# Altium PCB PlacaDriver.PcbDoc
Units mm, origin at the board's own origin, x right, y up, seen from the top; angles counter-clockwise.
Board outline 66.04 x 50 mm, 2 copper layers (Top Layer, Bottom Layer); 21 components, 15 nets, 54 pads, 4 vias.
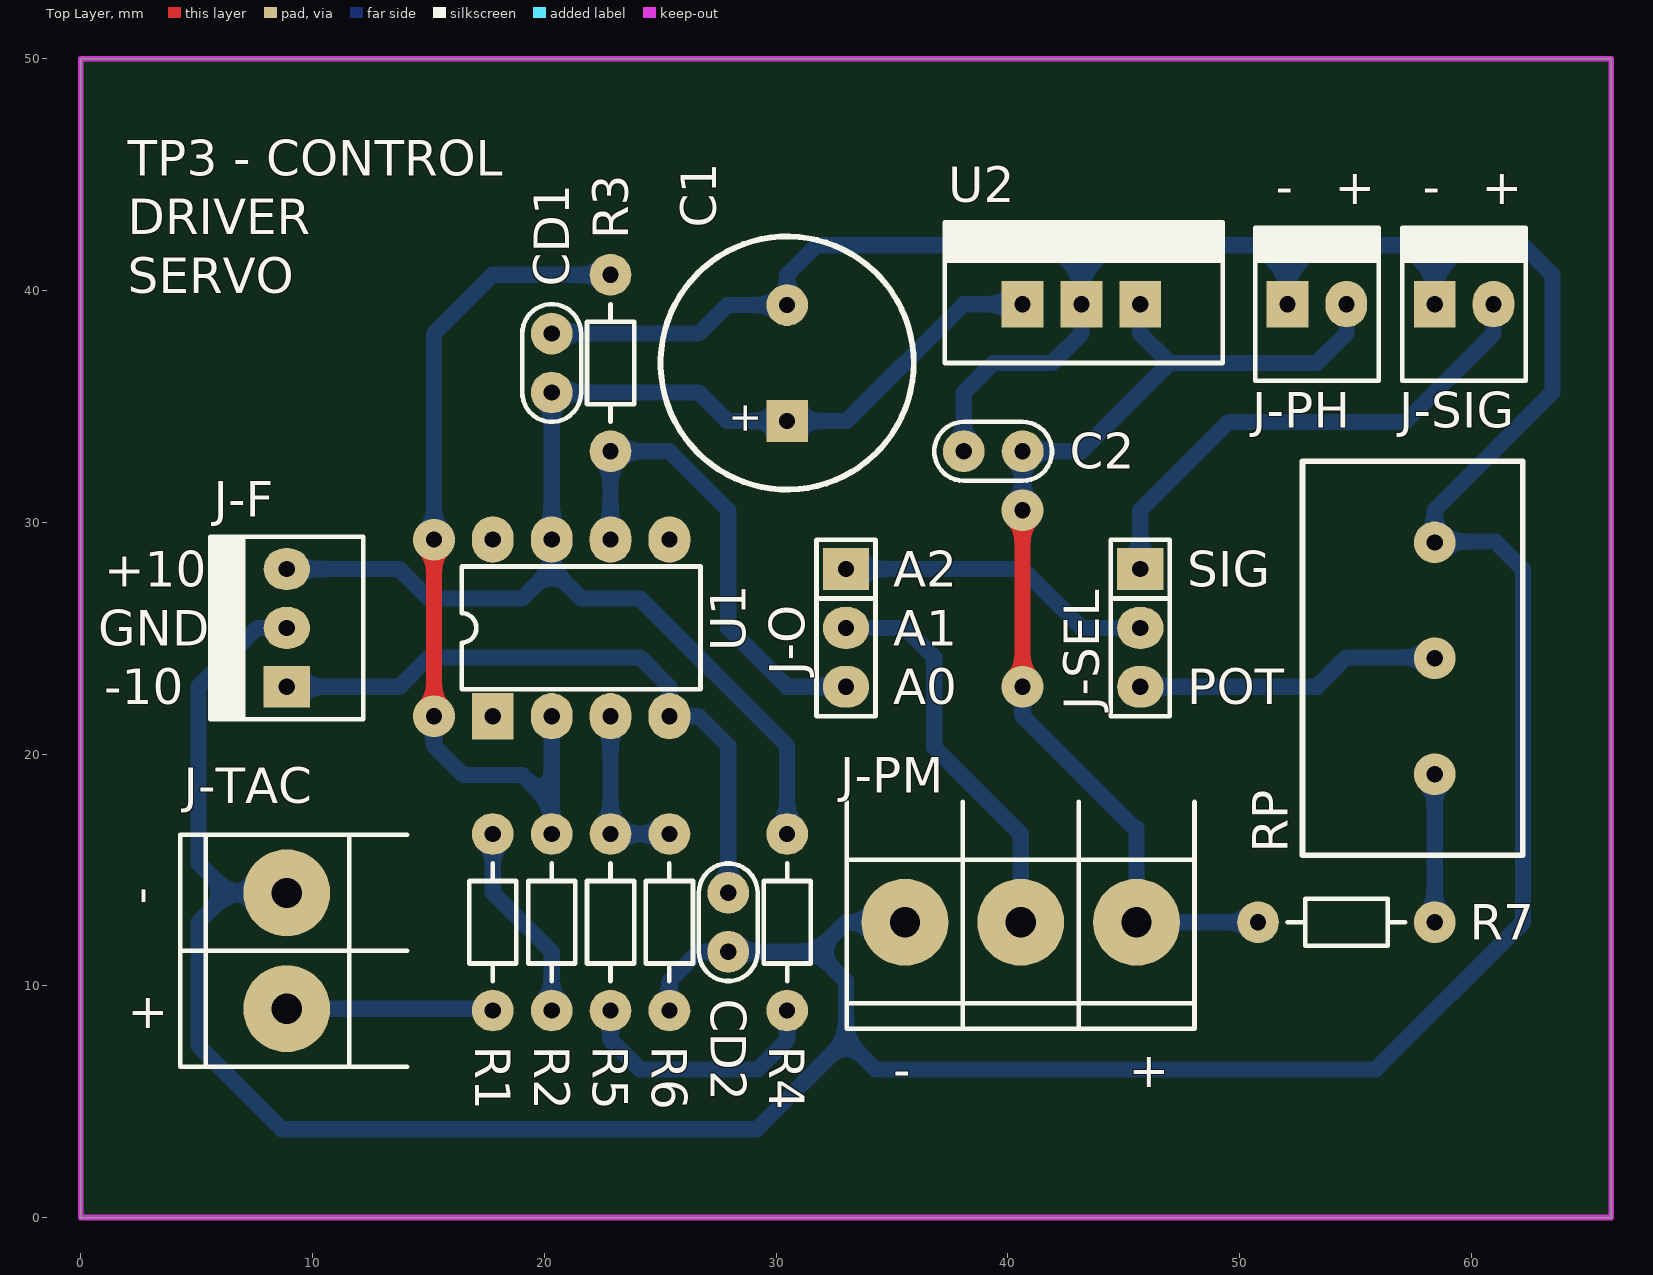
[diagram p0: Top Layer view]
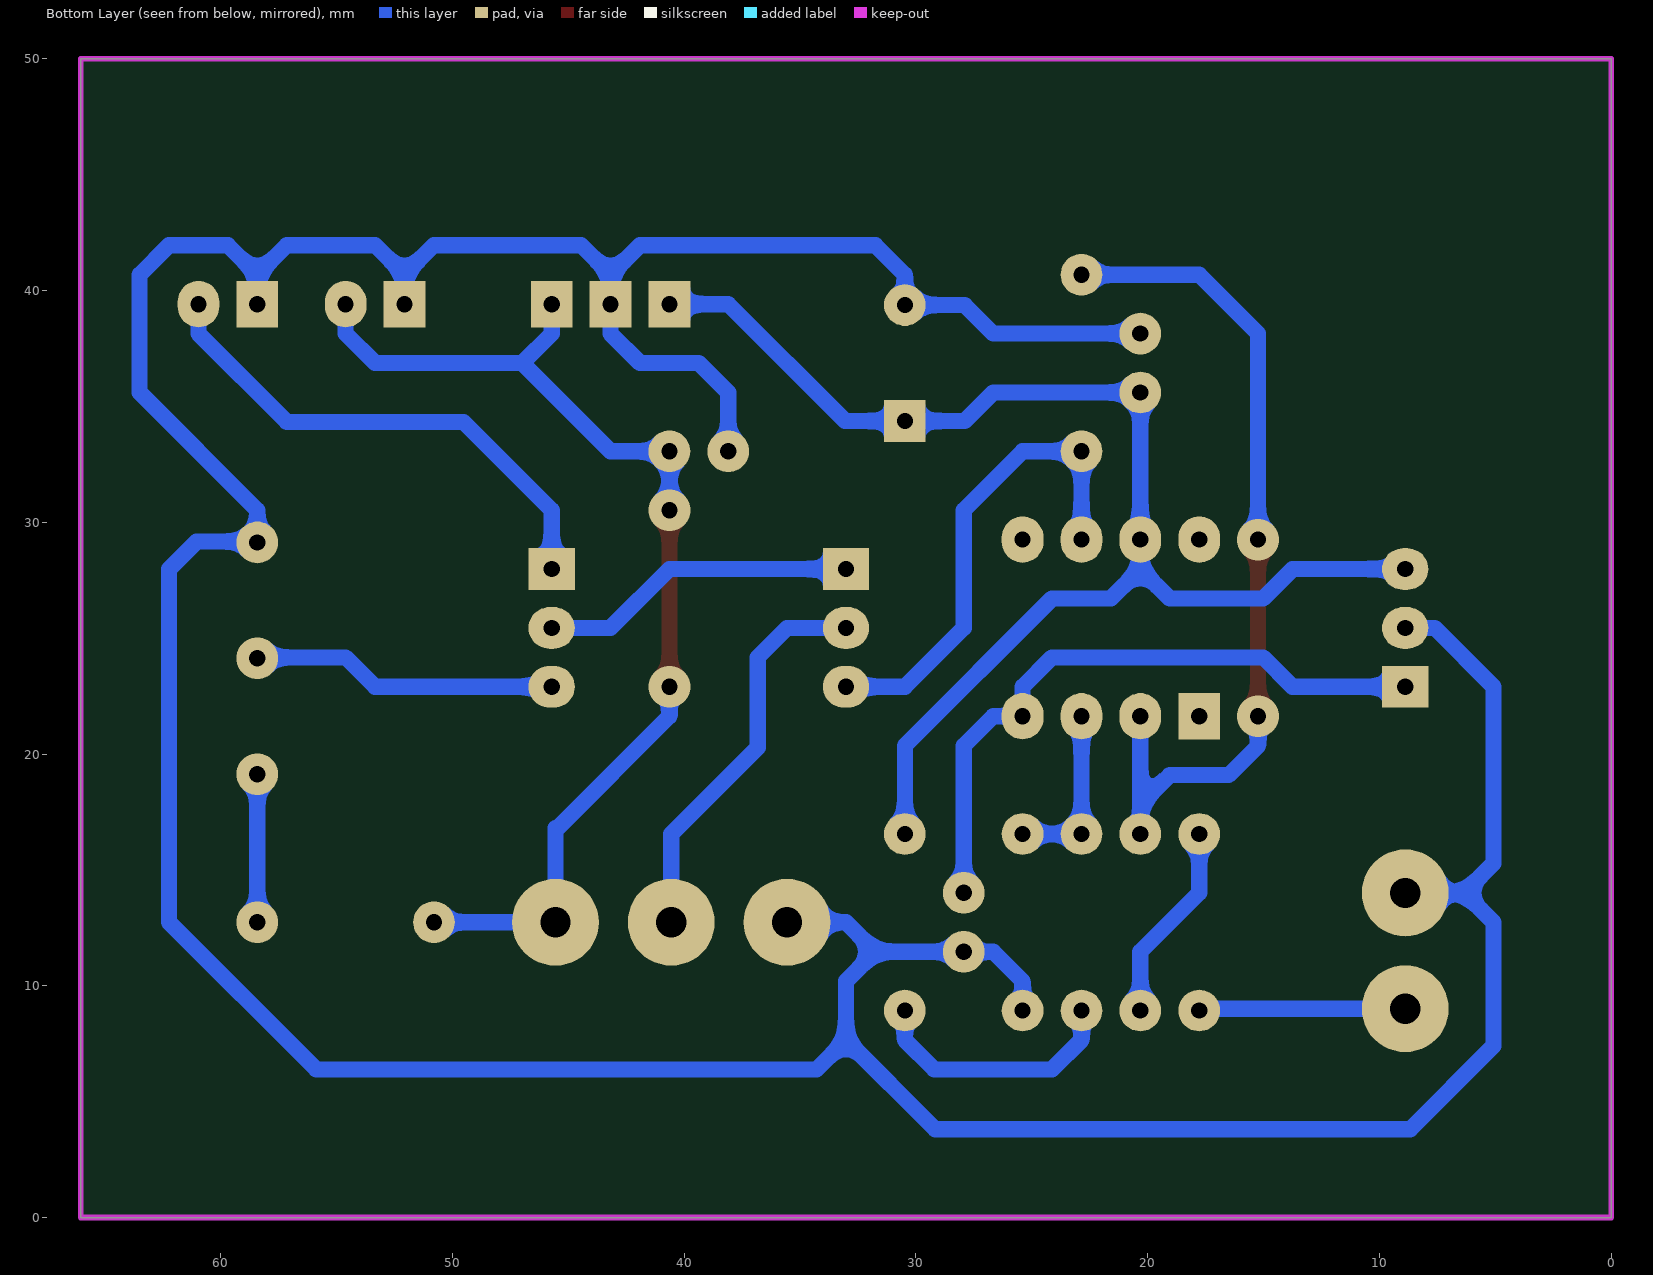
[diagram p1: Bottom Layer view, seen from below]
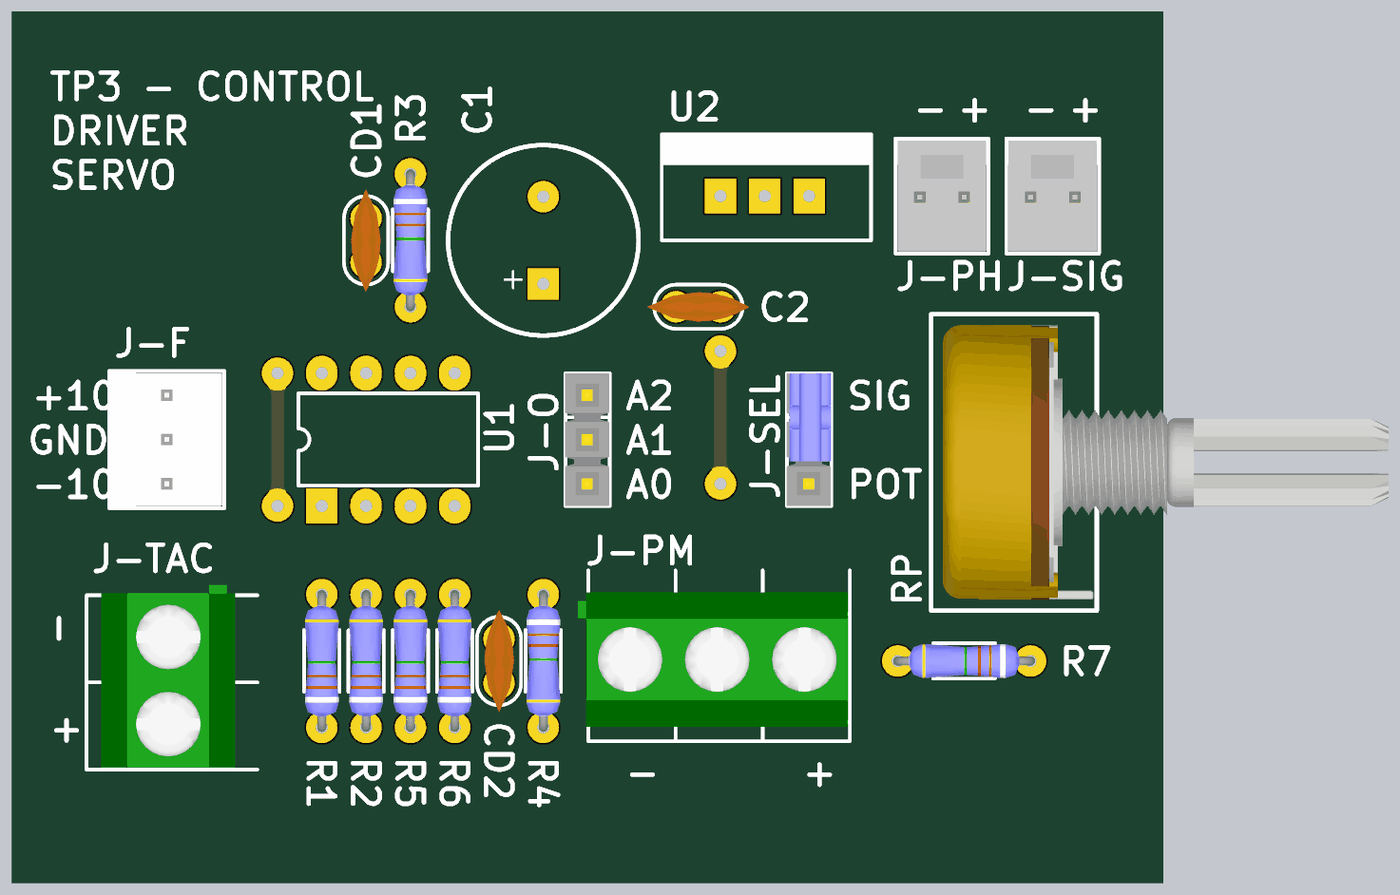
[diagram p2: 3D render of the assembled board from above, using the file's embedded part models]

## Layer stack, top to bottom
Top Solder: solder mask 0.0102, Solder Resist, Dk 3.5
Top Layer: signal copper 0.0356
Dielectric 1: dielectric 0.32, FR-4, Dk 4.8
Bottom Layer: signal copper 0.0356
Bottom Solder: solder mask 0.0102, Solder Resist, Dk 3.5

## Board outline
0,0 0,50 66.04,50 66.04,0

## Design rules (kind name [scope] priority, off if disabled: settings)
Clearance [All] p1: gap=0.7 ignorepadtopadclearanceinfootprint=FALSE
PolygonConnect [All] p1: connectstyle=Relief reliefconductorwidth=0.254 reliefentries=4 polygonreliefangle="90 Angle" airgapwidth=0.254
RoutingVias [All] p1: holewidth=0.7 width=1.8 viastyle="Through Hole" minholewidth=0.7 minwidth=1.8 maxholewidth=0.7 maxwidth=1.8
SolderMaskExpansion [All] p1: expansion=0.102
Width [All] p1: maxlimit=0.7 minlimit=0.7 preferedwidth=0.7
30 further rules are at their usual default settings.

## Components (designator, comment, footprint, x,y, rotation, side; value= is the part's Value field where it differs from the comment)
C1 "330u" CAP200RP 30.48,36.87 r90 top
C2 "100n" CAP100 39.37,33.06 r180 top
CD1 "100n" CAP100 20.32,36.87 r90 top
CD2 "100n" CAP100 27.94,12.74 r270 top
J-F "FUENTE" MOLEX3 8.89,22.9 r90 top
J-O "ARDUINO" SIP3 33.02,25.44 r270 top
J-PH "PUENTE H" MOLEX2 52.07,39.41 r0 top
J-PM "POTE MOTOR" BORNERA3 40.56,12.74 r90 top
J-SEL "A2 SELECT" JUMPER3 45.72,25.44 r270 top
J-SIG "SEÑAL" MOLEX2 58.42,39.41 r0 top
J-TAC "TACOMETRO" BORNERA2 8.89,11.51 r0 top
R1 "3K9" RES300 17.78,8.93 r90 top
R2 "100" RES300 20.32,8.93 r90 top
R3 "1K" RES300 22.86,40.68 r270 top
R4 "3K9" RES300 30.48,16.55 r270 top
R5 "100" RES300 22.86,8.93 r90 top
R6 "1K" RES300 25.4,8.93 r90 top
R7 "1K" RES300 58.42,12.74 r180 top
RP "5K" POTENCIOMETRO 58.42,24.13 r90 top
U1 "TL081JG" JG008 21.59,25.44 r0 top
U2 "7806" "TO-220 V" 43.18,39.41 r0 top

## Footprints (in the part's own frame and the unit in brackets; to place one, negate y for a bottom-side part, rotate by r counter-clockwise, add the part's x,y. Pads: shape width x height; smd on the part's side, far side on the other; paste and mask are expansions set on the pad)
BORNERA2 [mm] "Bornera con Tornillos 5mm separación"
  round 3.75 hole 1.3: 1(0,2.5) 2(0,-2.5)
  silkscreen extent -4.6,-5 5.2,5, body extent -3.76,-4.89 3.94,5.61, height 10
BORNERA3 [mm] "Bornera con Tornillos 5mm separación"
  round 3.75 hole 1.3: 1(0,5) 2(0,0) 3(0,-5)
  silkscreen extent -4.6,-7.5 5.2,7.5, body extent -3.76,-7.39 3.94,8.11, height 10.05
CAP100 [mm]
  round 1.8 hole 0.7: 1(-1.27,0) 2(1.27,0)
  silkscreen extent -2.54,-1.27 2.54,1.27, body extent -2.92,-0.84 2.92,0.86, height 6.12
CAP200RP [mm] "Body Diameter 10.33mm"
  rect 1.8x1.8 hole 0.7: 1(-2.5,0)
  round 1.8 hole 0.7: 2(2.5,0)
  silkscreen extent -5.46,-5.46 5.46,5.46, body extent -5.2,-5.18 5.18,5.21, height 20
JG008 [mm] "DIP; 8 Leads; Row Spacing 7.62 mm; Pitch 2.54 mm"
  rect 1.8x2 hole 0.7: 1(-3.81,-3.81)
  oval 1.8x2 hole 0.7: 2(-1.27,-3.81) 3(1.27,-3.81) 4(3.81,-3.81) 5(3.81,3.81) 6(1.27,3.81) 7(-1.27,3.81) 8(-3.81,3.81)
  silkscreen extent -5.15,-2.65 5.15,2.65
JUMPER3 [mm]
  rect 1.8x2 hole 0.7: 1(-2.54,0)
  oval 1.8x2 hole 0.7: 2(0,0) 3(2.54,0)
  silkscreen extent -3.81,-1.27 3.81,1.27, body extent -3.81,-1.3 3.81,1.27, height 16.15
MOLEX2 [mm]
  rect 1.8x2 hole 0.7: 1(0,0)
  oval 1.8x2 hole 0.7: 2(2.54,0)
  silkscreen extent -1.4,-3.3 3.94,3.3, body extent -1.27,-3.17 3.81,3.17, height 10.74
MOLEX3 [mm]
  rect 1.8x2 hole 0.7: 1(0,0)
  oval 1.8x2 hole 0.7: 2(2.54,0) 3(5.08,0)
  silkscreen extent -1.4,-3.3 6.48,3.3, body extent -1.27,-3.17 6.35,3.18, height 10.74
POTENCIOMETRO [mm]
  round 1.8 hole 0.7: 1(-5,0) 2(0,0) 3(5,0)
  silkscreen extent -8.5,-3.8 8.5,5.7, body extent -7.87,-20.53 7.87,5.03, height 20.12
RES300 [mm]
  round 1.8 hole 0.7: 1(0,0) 2(7.62,0)
  silkscreen extent 1.27,-1.02 6.35,1.02, body extent -0.25,-0.97 7.87,0.97, height 2.01
SIP3 [mm]
  rect 1.8x2 hole 0.7: 1(-2.54,0)
  oval 1.8x2 hole 0.7: 2(0,0) 3(2.54,0)
  silkscreen extent -3.81,-1.27 3.81,1.27, body extent -3.81,-1.3 3.81,1.24, height 8.38
"TO-220 V" [mm]
  rect 1.8x2 hole 0.7: 1(-2.54,0) 2(0,0) 3(2.54,0)
  silkscreen extent -5.9,-2.54 6.1,3.54, body extent -5,-2 5,3, height 18

## Part data
C1: library part CAPPOL
C2 CD1 CD2: library part CAP
J-F: library part MOLEX3
J-O: library part CON3
J-PH J-SIG: library part MOLEX2
J-PM: library part "BORNERA 3"
J-SEL: library part JUMPER3
J-TAC: library part "BORNERA 2"
R1 R2 R3 R4 R5 R6 R7: library part RES
RP: library part POTENCIOMETRO
U1: "JFET-Input Operational Amplifier", ComponentLink1Description="Manufacturer Link", ComponentLink1URL=http://www.ti.com/, ComponentLink2Description=Datasheet, ComponentLink2URL=http://www-s.ti.com/sc/ds/tl081.pdf, DatasheetVersion=Feb-1999, LatestRevisionDate=04-Mar-2005, LatestRevisionNote="Stylized 3D Model Added.", Note="Pin 8 is not connected", PackageDescription="DIP; 8 Leads; Row Spacing 7.62 mm; Pitch 2.54 mm", PackageReference=JG008, PackageVersion=Jan-1995, Published=16-Jan-2001, Publisher="Altium Limited"
U2: library part 78XX, "REGULDOR POSITIVO"

## Via types
v1: diameter 1.8, hole 0.7, Top Layer to Bottom Layer, 4 vias

## Nets (pads, with @x,y where several pads share a name; then routed paths per layer and width w, separated by ;. In a path a pad name is that pad's centre, name@x,y a point inside that pad or via, vN(x,y) a via of type N, cw(c..) or ccw(c..) an arc to the next point about the centre after c; other vN are vias at no path point)
+6V: C2.1 J-PH.2 J-PM.3 R7.2 U2.3 | length 48.1
  Top Layer w0.7: v1(40.64,22.9) v1(40.64,30.52)
  Bottom Layer w0.7: v1(40.64,22.9) 40.64,21.63 45.466,16.804 45.56,16.804 J-PM.3 R7.2 ; v1(40.64,30.52) C2.1 43.18,33.06 46.99,36.87 ; U2.3 45.72,38.14 46.99,36.87 ; J-PH.2 54.61,38.14 53.34,36.87 46.99,36.87
+10V: C1.1 CD1.1 J-F.3 R4.1 U1.7 U2.1 | length 60.1
  Bottom Layer w0.7: J-F.3 13.752,27.98 15.022,26.71 19.05,26.71 20.32,27.98 ; R4.1 30.48,20.36 24.13,26.71 21.59,26.71 20.32,27.98 ; U2.1 38.1,39.41 33.06,34.37 C1.1 27.9,34.37 26.67,35.6 CD1.1 U1.7 20.32,27.98
-10V: CD2.1 J-F.1 U1.4 | length 28.2
  Bottom Layer w0.7: J-F.1 13.752,22.9 15.022,24.17 24.13,24.17 25.4,22.9 U1.4 26.67,21.63 27.94,20.36 CD2.1
A0: J-O.3 R3.2 U1.6 | length 21.2
  Bottom Layer w0.7: U1.6 R3.2 25.4,33.06 27.94,30.52 27.94,25.44 30.48,22.9 J-O.3
A1: J-O.2 J-PM.2 | length 17.3
  Bottom Layer w0.7: J-O.2 35.56,25.44 36.83,24.17 36.83,20.28 40.56,16.55 J-PM.2
A2: J-O.1 J-SEL.2 | length 13.8
  Bottom Layer w0.7: J-O.1 40.64,27.98 43.18,25.44 J-SEL.2
GND: C1.2 C2.2 CD1.2 CD2.2 J-F.2 J-PH.1 J-PM.1 J-SIG.1 J-TAC.1 R6.1 RP.3 U2.2 | length 200.3
  Bottom Layer w0.7: J-TAC.1 6.35,14.01 ; J-F.2 7.62,25.44 5.08,22.9 5.08,15.28 6.35,14.01 ; CD1.2 26.67,38.14 27.9,39.37 C1.2 30.48,40.68 31.75,41.95 41.91,41.95 43.18,40.68 ; R6.1 25.4,10.2 26.67,11.47 CD2.2 31.75,11.47 ; J-PM.1 33.02,12.74 31.75,11.47 ; C2.2 38.1,35.6 39.37,36.87 41.91,36.87 43.18,38.14 U2.2 43.18,40.68 ; J-PH.1 52.07,40.68 ; J-SIG.1 58.42,40.68 ; 6.35,14.01 5.08,12.74 5.08,7.406 8.676,3.81 29.17,3.81 33.02,7.66 ; 31.75,11.47 33.02,10.2 33.02,7.66 ; 33.02,7.66 34.29,6.39 55.88,6.39 62.23,12.74 62.23,27.98 61.04,29.17 58.42,29.17 58.42,30.52 63.5,35.6 63.5,40.68 62.23,41.95 59.69,41.95 58.42,40.68 ; 43.18,40.68 44.45,41.95 50.8,41.95 52.07,40.68 ; 52.07,40.68 53.34,41.95 57.15,41.95 58.42,40.68
NetJ-SEL_1: J-SEL.1 J-SIG.2 | length 22.2
  Bottom Layer w0.7: J-SEL.1 45.72,30.52 49.53,34.33 57.15,34.33 60.96,38.14 J-SIG.2
NetJ-SEL_3: J-SEL.3 RP.2 | length 13.2
  Bottom Layer w0.7: J-SEL.3 53.34,22.9 54.61,24.17 RP.2@58.42,24.17
NetJ-TAC_2: J-TAC.2 R1.1 | length 8.9
  Bottom Layer w0.7: J-TAC.2 R1.1@17.78,9.01
NetR1_2: R1.2 R2.1 | length 8.7
  Bottom Layer w0.7: R1.2 17.78,14.01 20.32,11.47 R2.1
NetR2_2: R2.2 R3.1 U1.2 | length 37.7
  Top Layer w0.7: v1(15.24,21.63) v1(15.24,29.25)
  Bottom Layer w0.7: v1(15.24,21.63) 15.24,20.36 16.51,19.09 19.05,19.09 20.32,17.82 ; v1(15.24,29.25) 15.24,38.14 17.78,40.68 R3.1 ; R2.2 20.32,17.82 ; U1.2 20.32,17.82
NetR4_2: R4.2 R5.1 | length 11.2
  Bottom Layer w0.7: R5.1 22.86,7.66 24.13,6.39 29.21,6.39 30.48,7.66 R4.2
NetR5_2: R5.2 R6.2 U1.3 | length 7.6
  Bottom Layer w0.7: U1.3 R5.2 R6.2
NetR7_1: R7.1 RP.1 | length 6.4
  Bottom Layer w0.7: R7.1 RP.1@58.42,19.17
pads on no net: U1.1 U1.5 U1.8

## Keep-outs
Keep-Out Layer:
  the board outline again, w0.254

## Silkscreen, mask and mechanical layers (free items; w line width, h text height)
Top Overlay:
  text "TP3 - CONTROL" at 2.032,44.958 h1.52
  text "-" at 51.562,43.728 h1.52
  text "+" at 54.102,43.728 h1.52
  text "-" at 57.912,43.728 h1.52
  text "+" at 60.452,43.728 h1.52
  text "DRIVER" at 2.032,42.418 h1.52
  text "SERVO" at 2.032,39.878 h1.52
  text "+10" at 1.016,27.218 h1.52
  text "A2" at 35.052,27.218 h1.52
  text "SIG" at 47.752,27.218 h1.52
  text "GND" at 0.762,24.678 h1.52
  text "A1" at 35.052,24.678 h1.52
  text "-10" at 1.016,22.138 h1.52
  text "A0" at 35.052,22.138 h1.52
  text "POT" at 47.752,22.138 h1.52
  text "-" at 3.302,13.502 h1.52 r90
  text "+" at 2.032,8.168 h1.52
  text "-" at 35.052,5.628 h1.52
  text "+" at 45.212,5.628 h1.52

## Text inside footprints (layer, text, board x,y; h text height)
C1: Top Overlay "+" at 29.235,33.746 h1.27 r90